# Altium PCB RS485new2.PcbDoc
Units mm, origin at the board's own origin, x right, y up, seen from the top; angles counter-clockwise.
Board outline 33 x 20 mm, 2 copper layers (Top Layer, Bottom Layer); 37 components, 33 nets, 134 pads, 50 vias.
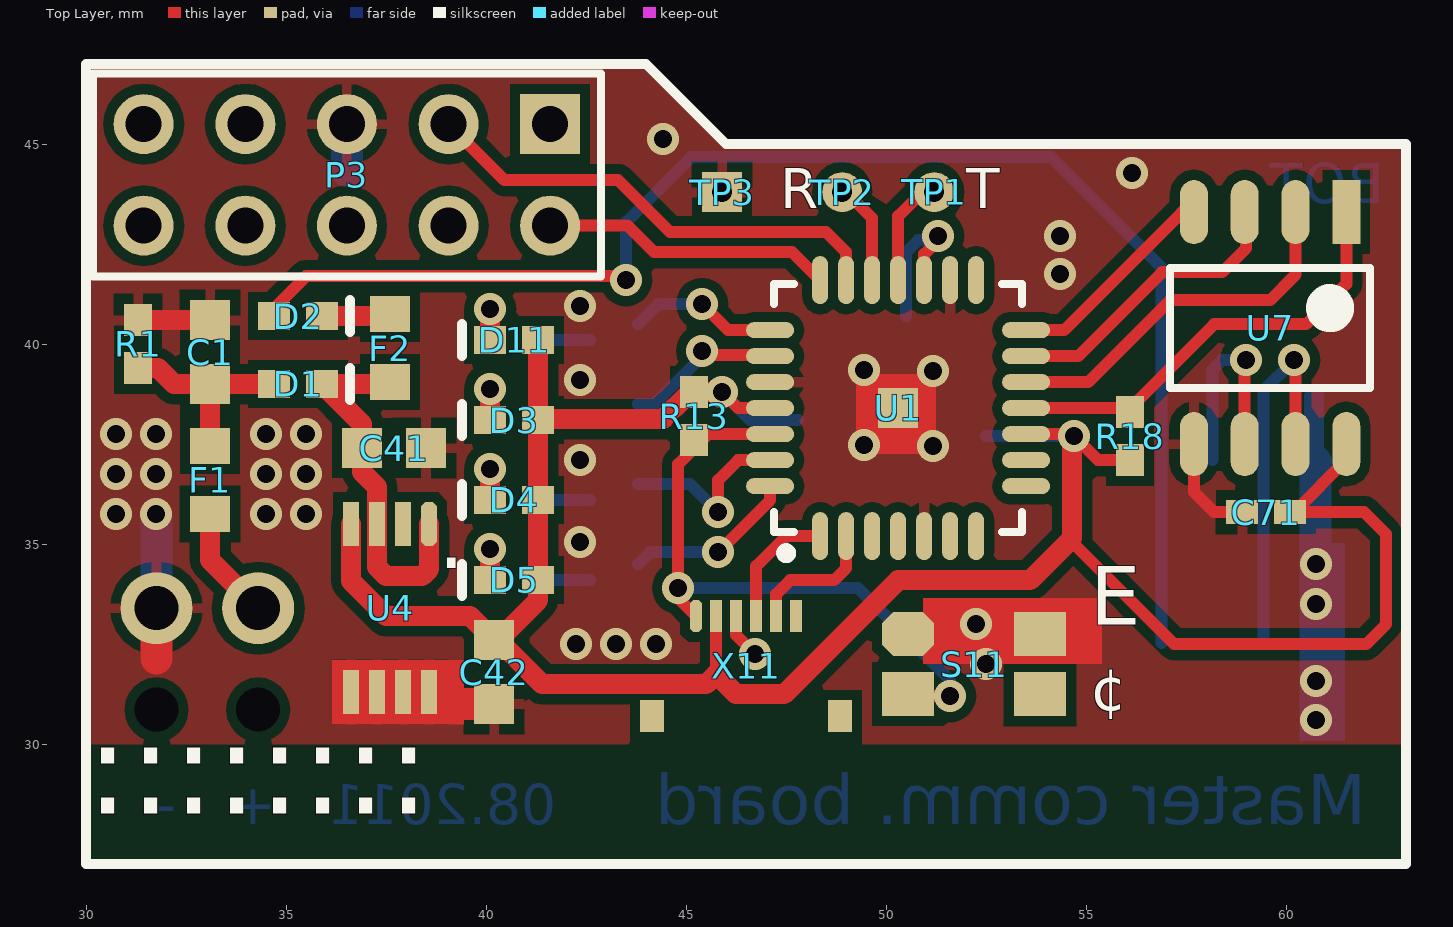
[diagram p0: Top Layer view]
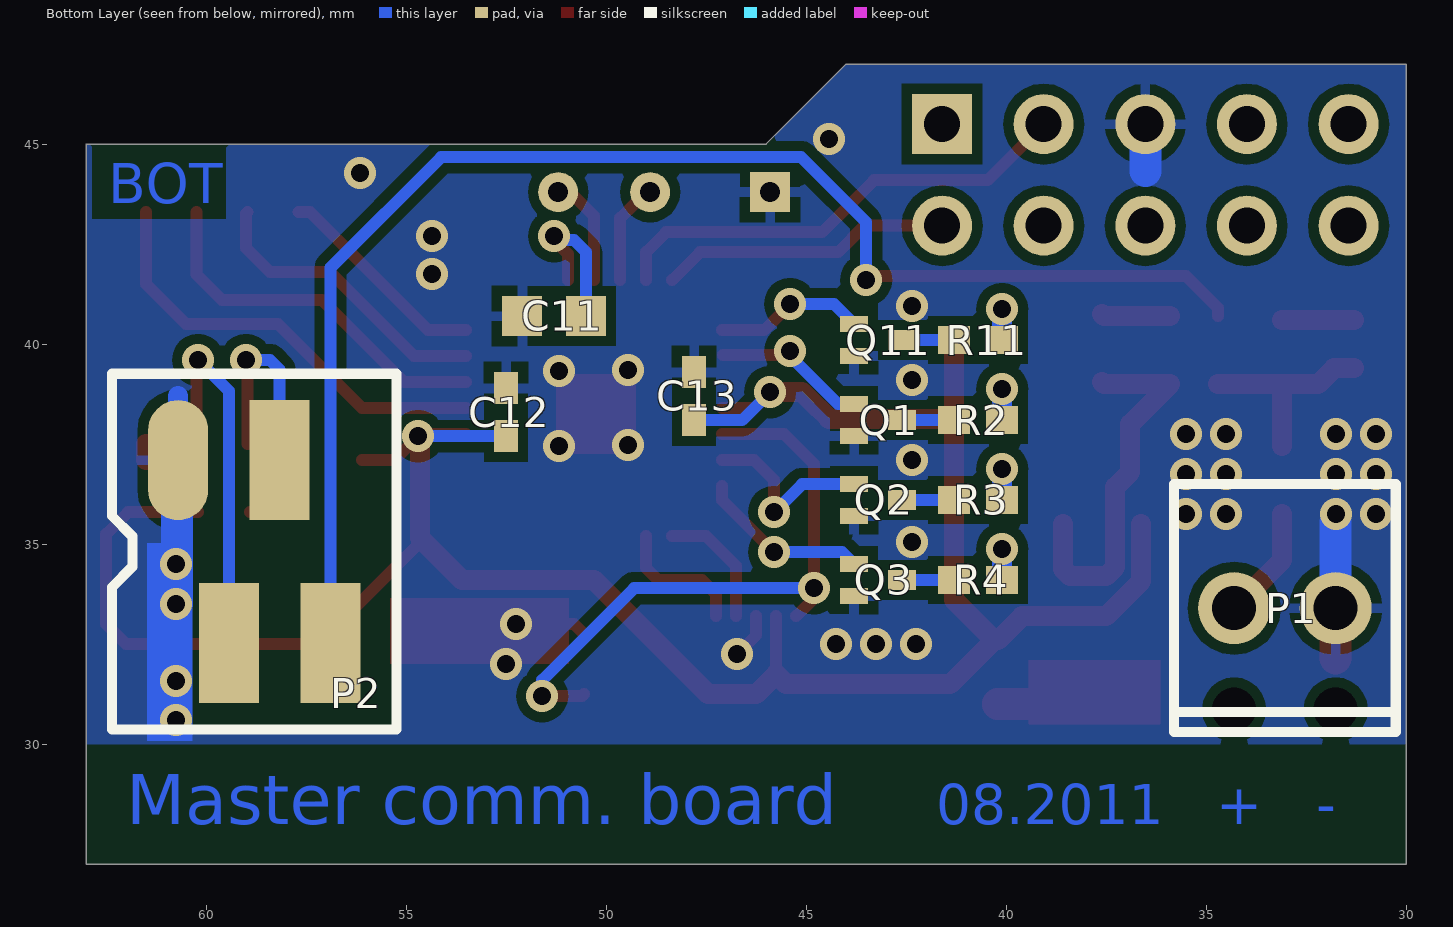
[diagram p1: Bottom Layer view, seen from below]

## Layer stack, top to bottom
Top Layer: signal copper 0.0356
Dielectric: dielectric 0.32, FR-4, Dk 4.8
Bottom Layer: signal copper 0.0356

## Board outline
30,27 30,47 44,47 46,45 63,45 63,27

## Design rules (kind name [scope] priority, off if disabled: settings)
Clearance Clearance_Polygons [InPolygon] p1: gap=0.254
Clearance [All] p2: gap=0.15
HoleSize [All] p1: absolutevalues=TRUE maxlimit=6.2 minlimit=0.35 maxpercent=80.000 minpercent=20.000
MinimumSolderMaskSliver [All] p1: minsoldermaskwidth=0.15
PolygonConnect PolygonConnect_vias [All vs IsVia] p1: connectstyle=Direct reliefconductorwidth=0.254 reliefentries=4 polygonreliefangle="90 Angle"
PolygonConnect [All vs Not IsVia] p2: connectstyle=Relief reliefconductorwidth=0.254 reliefentries=4 polygonreliefangle="90 Angle"
RoutingVias [All] p1: holewidth=0.5 width=0.8 viastyle="Through Hole" minholewidth=0.35 minwidth=0.5 maxholewidth=1.5 maxwidth=2
SilkToSilkClearance [All] p1 off: silktosilkclearance=0.254
SilkscreenOverComponentPads [All] p1 off: minsilkscreentomaskgap=0.254
SolderMaskExpansion [All] p1: expansion=0
Width [All] p1: maxlimit=5 minlimit=0.15 preferedwidth=0.5
24 further rules are at their usual default settings.

## Components (designator, comment, footprint, x,y, rotation, side; value= is the part's Value field where it differs from the comment)
C1 "1uF, 35V" CAPC1608N 33.1,39.8 r270 top
C11 "10uF" CAPC1608N 51.3,40.7 r180 bottom
C12 "100nF" CAPC1005N 52.5,38.3 r90 bottom
C13 "100nF" CAPC1005N 47.8,38.7 r90 bottom
C41 "1uF, 35V" CAPC1608N 37.7,37.4 r180 top
C42 "22uF, 6.3V" 1608-10 40.2,31.8 r270 top
C71 "100nF" CAPC1005N 59.5,35.8 r180 top
D1 "SS0503EC-TR-H" RESC1005N 35.3,39 r0 top
D2 "SS0503EC-TR-H" RESC1005N 35.3,40.7 r0 top
D3 "LED Yellow" RESC1005N 40.7,38.1 r180 top
D4 "LED Yellow" RESC1005N 40.7,36.1 r180 top
D5 "LED Yellow" RESC1005N 40.7,34.1 r180 top
D11 "LED Yellow" RESC1005N 40.7,40.1 r180 top
F1 "Ferrit 0.35R 500mA" RESC1608N_R 33.1,36.6 r90 top
F2 "Ferrit 0.35R 500mA" RESC1608N_R 37.6,39.9 r270 top
P1 "Bornier à vis" CONN_100MIL_2 34.3,33.4 r180 bottom
P2 "MM4-SMD" MM4-SMD 60.7,37.1 r180 bottom
P3 "Header 5X2" HDR2X5 41.6,45.5 r180 top
Q1 "2SK3547G0L" SSS-Mini-3P 43.2,38.1 r180 bottom
Q2 "2SK3547G0L" SSS-Mini-3P 43.2,36.1 r180 bottom
Q3 "2SK3547G0L" SSS-Mini-3P 43.2,34.1 r180 bottom
Q11 "2SK3547G0L" SSS-Mini-3P 43.2,40.1 r180 bottom
R1 "100K" RESC1005N 31.3,40 r90 top
R2 "270R" RESC1005N 40.7,38.1 r0 bottom
R3 "270R" RESC1005N 40.7,36.1 r0 bottom
R4 "270R" RESC1005N 40.7,34.1 r0 bottom
R11 "270R" RESC1005N 40.7,40.1 r0 bottom
R13 "10K" RESC1005N 45.2,38.2 r270 top
R18 "10K" RESC1005N 56.1,37.7 r90 top
S11 "EVPAA" EVPAA 52.2,32 r0 top
TP1 "TP" TPLOGI#1 51.2,43.8 r0 top
TP2 "TP" TPLOGI#1 48.9,43.8 r90 top
TP3 "TP" TPLOGI#2 45.9,43.8 r90 top
U1 "dsPIC33FJ128MC802-I/MM" QFNS-MM28_M_SmallExp 50.3,38.4 r90 top
U4 "MIC5239-3.3YMM" MSOP-8 37.6,33.4 r270 top
U7 "ADM3078E" SOIC-8_M 59.6,40.4 r270 top
X11 "FH19C-6S-0.5SH" FH19C-6S-0.5SH 46.5,33.2 r90 top

## Footprints (in the part's own frame and the unit in brackets; to place one, negate y for a bottom-side part, rotate by r counter-clockwise, add the part's x,y. Pads: shape width x height; smd on the part's side, far side on the other; paste and mask are expansions set on the pad)
1608-10 [mm] "Capacitor, SM Tantalum; Body 1.6 x 0.85 mm (LxW typ)"
  rect 1x1 smd: 1(-0.8,0) 2(0.8,0)
  body extent -0.87,-0.48 0.87,0.48, height 0.9
CAPC1005N [mm] "Chip Capacitor, Body 1.0x0.5mm, IPC Medium Density"
  rect 0.8x0.6 smd: 1(-0.6,0) 2(0.6,0)
  body extent -0.55,-0.3 0.55,0.3, height 0.6
CAPC1608N [mm] "Chip Capacitor, Body 1.6x0.8mm, IPC Medium Density"
  rect 1x1 smd: 1(-0.8,0) 2(0.8,0)
  body extent -0.87,-0.48 0.87,0.48, height 0.85
CONN_100MIL_2 [mm] "Connector, 2.54 mm pitch, 2 pins"
  round 1 hole 1.1: 0(0,-2.54) 0(2.54,-2.54)
  round 1.8 hole 1.1: 1(0,0) 2(2.54,0)
  silkscreen extent -1.5,-3.1 4.04,3.1, body extent -1.63,-3.23 4.17,3.23, height 8.5
EVPAA [mm] "Push button, Body 3.5x2.9mm, Pitch 2.1mm, IPC Low Density"
  oct 1.3x1.1 smd: 1(-1.65,0.75)
  rect 1.3x1.1 smd: 2(-1.65,-0.75) 3(1.65,-0.75) 4(1.65,0.75)
  body extent -1.75,-1.45 1.75,1.45, height 1.7
FH19C-6S-0.5SH [mm] "Board-to-flexible-PCB connector, 6 pins, Body 5.15x3mm, Pitch 0.5mm, IPC Low Density"
  rect 0.8x0.6 smd: 0(-2.5,-2.35) 0(-2.5,2.35)
  oct 0.8x0.3 smd: 1(0,1.25)
  rect 0.8x0.3 smd: 2(0,0.75) 3(0,0.25) 4(0,-0.25) 5(0,-0.75) 6(0,-1.25)
  body extent -3.05,-2.6 0.25,2.6, height 1
HDR2X5 [mm] "Connector; Header; 5x2 Position"
  rect 1.5x1.5 hole 0.9: 1(0,0)
  round 1.5 hole 0.9: 2(0,2.54) 3(2.54,0) 4(2.54,2.54) 5(5.08,0) 6(5.08,2.54) 7(7.62,0) 8(7.62,2.54) 9(10.16,0) 10(10.16,2.54)
  silkscreen extent -1.27,-1.27 11.43,3.81
MM4-SMD [mm] "MicroMatch 4 (SMD)"
  oval 1.5x3 smd: 1(0,0)
  rect 1.5x3 smd: 2(1.27,-4.572) 3(2.54,0) 4(3.81,-4.572)
  silkscreen extent -1.65,-6.73 5.46,2.16
MSOP-8 [mm] "MSOP, 8-Leads, Body 3x3mm, Pitch 0.65mm, IPC Medium Density"
  oct 1.1x0.4 smd: 1(-2.1,0.975)
  rect 1.1x0.4 smd: 2(-2.1,0.325) 3(-2.1,-0.325) 4(-2.1,-0.975) 5(2.1,-0.975) 6(2.1,-0.325) 7(2.1,0.325) 8(2.1,0.975)
  body extent -1.5,-1.5 1.5,1.5, height 1.1
QFNS-MM28_M_SmallExp [mm] "QFN, 28-Leads, Body 6x6 mm, Pitch 0.65mm, IPC Low Density"
  oval 1.2x0.4 smd: 1(-3.2,1.95) 2(-3.2,1.3) 3(-3.2,0.65) 4(-3.2,0) 5(-3.2,-0.65) 6(-3.2,-1.3) 7(-3.2,-1.95) 15(3.2,-1.95) 16(3.2,-1.3) 17(3.2,-0.65) 18(3.2,0) 19(3.2,0.65) 20(3.2,1.3) 21(3.2,1.95)
  oval 0.4x1.2 smd: 8(-1.95,-3.2) 9(-1.3,-3.2) 10(-0.65,-3.2) 11(0,-3.2) 12(0.65,-3.2) 13(1.3,-3.2) 14(1.95,-3.2) 22(1.95,3.2) 23(1.3,3.2) 24(0.65,3.2) 25(0,3.2) 26(-0.65,3.2) 27(-1.3,3.2) 28(-1.95,3.2)
  rect 1x1 smd: 29(0,0)
  silkscreen extent -3.75,-3.1 3.1,3.1, body extent -3.08,-3.08 3.08,3.08, height 1
RESC1005N [mm] "Chip Resistor, Body 1.1x0.5mm, IPC Medium Density"
  rect 0.8x0.7 smd: 1(-0.6,0) 2(0.6,0)
  body extent -0.55,-0.3 0.55,0.3, height 0.4
RESC1608N_R [mm] "Chip Resistor, Body 1.6x0.8mm, IPC Medium Density"
  rect 0.9x1 smd: 1(-0.85,0) 2(0.85,0)
  body extent -0.85,-0.48 0.85,0.48, height 0.6
SOIC-8_M [mm] "SOIC, 8-Leads, Body 4.9x3.9mm, Pitch 1.27mm, IPC Low Density"
  rect 1.6x0.7 smd: 1(-2.9,1.905)
  oval 1.6x0.7 smd: 2(-2.9,0.635) 3(-2.9,-0.635) 4(-2.9,-1.905) 5(2.9,-1.905) 6(2.9,-0.635) 7(2.9,0.635) 8(2.9,1.905)
  silkscreen extent -1.5,-2.5 1.5,2.5, body extent -2,-2.5 2,2.5, height 1.73
SSS-Mini-3P [mm] "3-Pin Transistor Package, Body 1.2x0.8mm, IPC Low Density"
  rect 0.7x0.4 smd: 1(-0.6,0.4) 2(-0.6,-0.4)
  rect 0.7x0.5 smd: 3(0.6,0)
  body extent -0.4,-0.6 0.4,0.6, height 0.51
TPLOGI#1 [mm] "Douille logidule"
  round 1 hole 0.5: 1(0,0)
TPLOGI#2 [mm] "Douille logidule"
  rect 1x1 hole 0.5: 1(0,0)

## Part data
C1 C11 C12 C13 C41 C71: library part Cap, "Capacitor"
C42: library part "Cap Pol2", "Polarized Capacitor"
D1 D2: library part "D Schottky", "Schottky Diode"
D3 D4 D5 D11: library part LED, "LED"
F1 F2: library part "Fuse 1", "Ferrit Bead"
P1: library part "Header 2", "Header, 2-Pin"
P2: library part "Header 4", "Header, 4-Pin"
P3: "Header, 5-Pin, Dual row"
Q1 Q2 Q3 Q11: library part nFET, "N-Channel MOSFET 100mA, 50V, 12R"
R1 R2 R3 R4 R11 R13 R18: library part Res1, "Resistor"
S11: library part "Push button", "Push button"
TP1 TP2 TP3: "Test Point"
U1: "High-Performance 16-bit Digital Signal Controller, 128 KB Flash, 16 KB RAM, 28-Pin QFN, Industrial Temperature"
U4: library part MIC5239, "LDO, 500mA, Vin:2.3V-30V"
U7: "Half-Duplex RS485 Transciever, 3.3V, 16Mbps"
X11: library part FH19C-6, "Board to flexible PCB/wire connector"

## Via types
v1: diameter 0.8, hole 0.45, Top Layer to Bottom Layer, tented both sides, 50 vias

## Nets (pads, with @x,y where several pads share a name; then routed paths per layer and width w, separated by ;. In a path a pad name is that pad's centre, name@x,y a point inside that pad or via, vN(x,y) a via of type N, cw(c..) or ccw(c..) an arc to the next point about the centre after c; other vN are vias at no path point)
3.3V: C12.1 C13.1 C42.1 C71.1 D3.1 D4.1 D5.1 D11.1 R13.1 R18.1 U1.10 U1.25 U4.4 U7.8 X11.2 | length 64.4
  Top Layer w0.3: 45.75,31.75 X11.2 45.75,32.75 ; v1(45.9,38.8) 46.3,38.4 U1.25 ; U1.10 54.65,37.75 v1(54.7,37.7) 55.3,37.1 R18.1 ; 54.6,35.1 57.2,32.5 62,32.5 62.5,33 62.5,35.25 61.95,35.8 60.2,35.8 U7.8@61.505,37.105
  Top Layer w0.5: U4.4 36.625,34.075 37.5,33.2 39.6,33.2 C42.1 C42.1@40.3,32.6 ; 41.3,33.6 C42.1@40.3,32.6 ; 41.3,33.7 D5.1 D4.1 D3.1 ; D11.1 D3.1 ; R13.1@45.1,38.8 44.7,38.4 44.684,38.4 44.45,38.166 44.45,38.15 44.425,38.125 41.325,38.125 D3.1 ; R13.1 v1(45.9,38.8) ; v1@54.65,37.75 54.65,35.15 54.6,35.1 53.6,34.1 50.3,34.1 47.45,31.25 46.25,31.25 45.75,31.75 45.5,31.5 41.4,31.5 C42.1@40.3,32.6 ; U7.8@61.505,37.105 U7.8
  Bottom Layer w0.3: v1(45.9,38.8) 46.6,38.1 C13.1 ; C12.1 v1(54.7,37.7)
5V: C1.2 D1.1 F1.2 R1.1 | length 5.1
  Top Layer w0.5: R1.1 31.8,39.4 32.2,39 C1.2 ; F1.2 C1.2 ; D1.1 C1.2
GND: C1.1 C11.1 C12.2 C13.2 C41.1 C42.2 C71.2 P1.2 P2.1 P3.5 Q1.2 Q2.2 Q3.2 Q11.2 R1.2 S11.1 S11.4 TP3.1 U1.5 U1.16 U1.24 U1.29 U4.5 U4.6 U4.7 U4.8 U7.5 X11.3 | length 18.2
  Top Layer w0.3: X11.3 46.25,32.725 v1(46.725,32.25) ; S11.1 50.8,33 v1(52.25,33) ; U7.5 57.695,36.305 58.2,35.8 C71.2
  Top Layer w0.5: R1.2 C1.1
  Top Layer w0.8: 31.76,32.14 P1.2 ; 39.2,31 C42.2
  Bottom Layer w0.5: P2.1 60.7,38.7
  Bottom Layer w0.8: P1.2 v1@31.76,35.54 ; 36.52,44.33 P3.5 ; P2.1 P2.1@60.73,37.07 ; v1@60.73,33.5 60.73,34.5 P2.1@60.73,37.07 ; P2.1@60.75,37.05 P2.1@60.73,37.07
  other v1: 60.75,30.6 60.75,31.575 52.5,32 42.25,32.5 43.25,32.5 44.25,32.5 60.75,33.5 60.75,34.5 42.35,35.05 30.75,35.75 31.75,35.75 34.5,35.75 35.5,35.75 30.75,36.75 31.75,36.75 34.5,36.75 35.5,36.75 42.35,37.1 51.175,37.45 49.45,37.475 30.75,37.75 31.75,37.75 34.5,37.75 35.5,37.75 42.35,39.1 51.175,39.325 49.45,39.35 42.35,40.95 54.35,41.75 54.35,42.7 56.15,44.275 44.425,45.125
LEDA: Q1.1 U1.23 | length 4.1
  Top Layer w0.3: v1@45.4,39.9 45.575,39.725 U1.23@47.075,39.725
  Bottom Layer w0.3: Q1.1 44.2,38.5 45.375,39.675 45.4,39.675 v1@45.4,39.9
  other v1: 45.4,39.825
LEDB: Q2.1 U1.27 | length 4.6
  Top Layer w0.3: v1(45.8,35.8) 45.8,36.6 46.3,37.1 U1.27
  Bottom Layer w0.3: Q2.1 45.1,36.5 v1(45.8,35.8)
LEDC: Q3.1 U1.28 | length 4.3
  Top Layer w0.3: v1(45.8,34.8) 47.1,36.1 U1.28
  Bottom Layer w0.3: Q3.1 44.1,34.8 v1(45.8,34.8)
LEDG: Q11.1 U1.22 | length 3.8
  Top Layer w0.3: v1(45.4,41) 46.05,40.35 U1.22
  Bottom Layer w0.3: Q11.1 44.3,41 v1(45.4,41)
M\C\L\R\: R13.2 S11.2 U1.26 X11.1 | length 15.8
  Top Layer w0.3: X11.1 44.8,33.65 v1(44.8,33.9) 44.8,37 45.4,37.6 45.55,37.75 U1.26 ; S11.2 50.6,31.2 v1(51.6,31.2)
  Bottom Layer w0.3: v1(44.8,33.9) 49.3,33.9 51.6,31.6 v1(51.6,31.2)
NetC11_2: C11.2 U1.17 | length 3.7
  Top Layer w0.3: U1.17 50.95,42.25 v1@51.3,42.6
  Bottom Layer w0.3: C11.2 50.5,42.3 50.8,42.6 v1@51.3,42.6
  other v1: 51.3,42.7
NetD2_2: D2.2 F2.1 | length 1.7
  Top Layer w0.5: D2.2 37.55,40.7 F2.1
NetD3_2: D3.2 R2.1 | length 1.6
  Top Layer w0.5: D3.2 v1(40.1,38.875)
  Bottom Layer w0.5: R2.1 v1(40.1,38.875)
NetD4_2: D4.2 R3.1 | length 1.6
  Top Layer w0.5: D4.2 v1(40.1,36.875)
  Bottom Layer w0.5: R3.1 v1(40.1,36.875)
NetD5_2: D5.2 R4.1 | length 1.6
  Top Layer w0.5: D5.2 v1(40.1,34.875)
  Bottom Layer w0.5: R4.1 v1(40.1,34.875)
NetD11_2: D11.2 R11.1 | length 1.6
  Top Layer w0.5: D11.2 v1(40.1,40.875)
  Bottom Layer w0.5: R11.1 v1(40.1,40.875)
NetQ1_D: Q1.3 R2.2 | length 1.3
  Bottom Layer w0.3: R2.2 Q1.3
NetQ2_D: Q2.3 R3.2 | length 1.3
  Bottom Layer w0.3: R3.2 Q2.3
NetQ3_D: Q3.3 R4.2 | length 1.3
  Bottom Layer w0.3: R4.2 Q3.3
NetQ11_D: Q11.3 R11.2 | length 1.3
  Bottom Layer w0.3: R11.2 Q11.3
PGC: U1.2 X11.5 | length 3.4
  Top Layer w0.3: X11.5 47.25,33.75 47.6,34.1 48.7,34.1 49,34.4 U1.2
PGD: U1.1 X11.4 | length 3.2
  Top Layer w0.3: X11.4 46.75,34.45 47.5,35.2 U1.1
RS485_DE: U1.13 U7.3 | length 7.5
  Top Layer w0.3: U1.13 54.8,39.7 56.9,41.8 58.4,41.8 59,42.4 59,43.265 U7.3
RS485_DI: U1.14 U7.4 | length 5.4
  Top Layer w0.3: U1.14 54.45,40.35 57.4,43.3 U7.4
RS485_R\E\: U1.12 U7.2 | length 9.4
  Top Layer w0.3: U1.12 55.05,39.05 57.1,41.1 59.6,41.1 60.235,41.735 U7.2
RS485_RO: R18.2 U1.11 U7.1 | length 11.1
  Top Layer w0.3: U1.11 56.1,38.4 58.2,40.5 60.5,40.5 61.505,41.505 U7.1
RS485A: P2.3 U7.6 | length 5.2
  Top Layer w0.3: U7.6 v1@58.965,39.535
  Bottom Layer w0.3: P2.3 58.16,39.36 58.4,39.6 v1(59,39.6)
RS485B: P2.2 U7.7 | length 9.4
  Top Layer w0.3: U7.7 v1@60.235,39.465
  Bottom Layer w0.3: P2.2 59.43,38.83 v1(60.2,39.6)
U1RX: P3.3 U1.20 | length 12
  Top Layer w0.3: P3.3 40.46,44.1 43.3,44.1 44.6,42.8 48.5,42.8 49,42.3 U1.20
U1TX: P3.2 U1.21 | length 7.3
  Top Layer w0.3: P3.2 43.54,42.96 44.2,42.3 47.65,42.3 U1.21
U2RX: TP2.1 U1.19 | length 2.8
  Top Layer w0.3: TP2.1@48.8,44 49.65,43.15 U1.19
U2TX: TP1.1 U1.18 | length 2.7
  Top Layer w0.3: U1.18 50.3,43.2 TP1.1@51.1,44
VBUSL: D2.1 P2.4 | length 35.4
  Top Layer w0.3: D2.1 34.7,40.9 35.5,41.7 43.4,41.7 v1(43.5,41.6)
  Bottom Layer w0.3: v1(43.5,41.6) 43.5,43.05 45.125,44.675 54.125,44.675 56.89,41.91 P2.4
VDD: C41.2 D1.2 F2.2 U4.1 U4.3 | length 9.6
  Top Layer w0.5: F2.2 37.55,39 D1.2 36.9,38 C41.2 36.9,36.8 37.275,36.425 U4.3 37.275,34.425 37.5,34.2 38.4,34.2 ; 38.5,34.3 38.4,34.2 ; U4.1 38.575,34.375 38.4,34.2
VDDUSB: F1.1 P1.1 | length 2.8
  Top Layer w0.5: F1.1 33.1,34.6 P1.1
pads on no net: P1.0 P3.1 P3.4 P3.6 P3.7 P3.8 P3.9 P3.10 S11.3 U1.3 U1.4 U1.6 U1.7 U1.8 U1.9 U1.15 U4.2 X11.0 X11.6

## Polygon pours and split planes (outlines as drawn)
GND on Top Layer "GNDTOP" (solid, remove dead copper, pour order 1000): 30,47 30,30 63,30 63,45 46,45 44,47
GND on Bottom Layer "GNDBOT" (solid, remove dead copper, pour order 1001): 30,30 30,47 44,47 46,45 63,45 63,30

## Other copper
Top Layer:
  rectangle net GND: 36.146,30.496 39.446,32.104
  rectangle net GND: 49.25,37.25 51.25,39.25
  rectangle net GND: 50.925,32 55.4,33.65
Bottom Layer:
  rectangle net GND: 60.339,30.075 61.475,35.028
  pour cut-out: 55.25,39.25 55.25,30.25 60.45,30.25 60.35,39.25
  text "BOT" at 62.45,43.525 h1
  text "-" at 32.25,28 h1
  text "+" at 34.75,28 h1
  text "08.2011" at 41.75,28 h1
  text "Master comm. board" at 62,28 h1.25

## Silkscreen, mask and mechanical layers (free items; w line width, h text height)
Top Overlay:
  lines w0.25: 36.6,38.6 36.6,39.4 ; 36.6,40.3 36.6,41.1 ; 39.4,33.7 39.4,34.5 ; 39.4,35.7 39.4,36.5 ; 39.4,37.7 39.4,38.5 ; 39.4,39.7 39.4,40.5 ; 30,27 30,47 44,47 46,45 63,45 63,27 30,27
  text "R" at 47.35,43.4 h1
  text "T" at 52,43.4 h1
  text "." at 38.8,34.4 h1.52
  text "E" at 55.1,32.5 h2.5
  text "¢" at 55.1,30.5 h1.81
  text "::::::::" at 30,27.5 h4
Mechanical 1:
  the board outline again, w0.25

## Dimensions
30,27 to 30,47 on Mechanical 1
30,47 to 44,47 on Mechanical 1
46,45 to 44,47 on Mechanical 1
46,45 to 63,45 on Mechanical 1
30,27 to 31.76,30.86 on Mechanical 1
30,27 to 31.76,30.86 on Mechanical 1
63,27 to 63,45 on Mechanical 1